# EAGLE board perfect_cubev2_ITLL version (EAGLE 9.5.1)
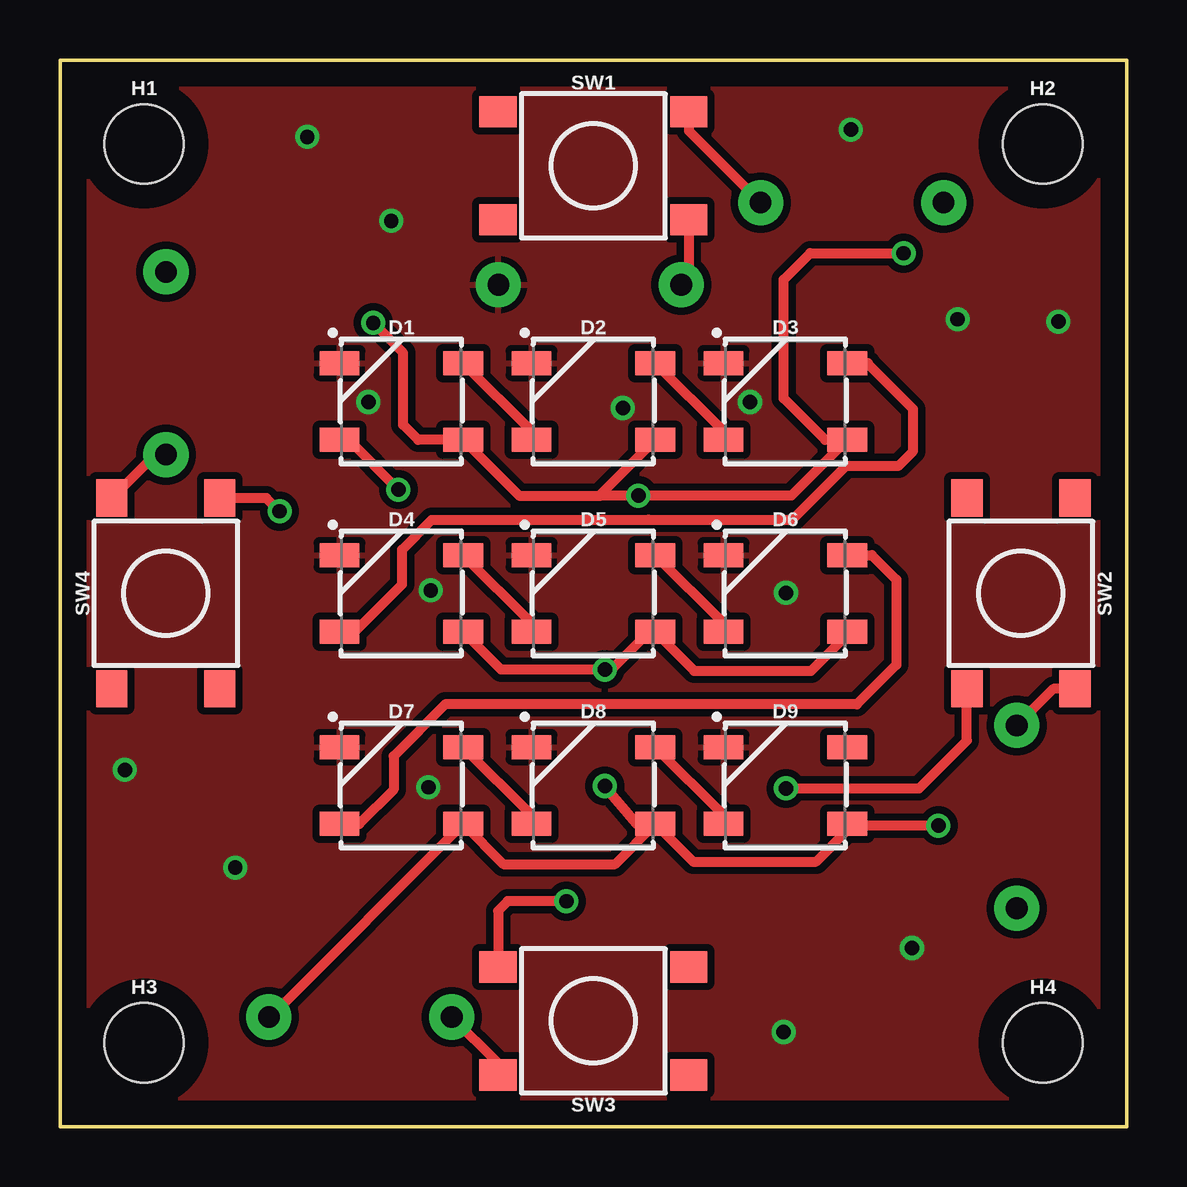
[diagram p0: board, top side]
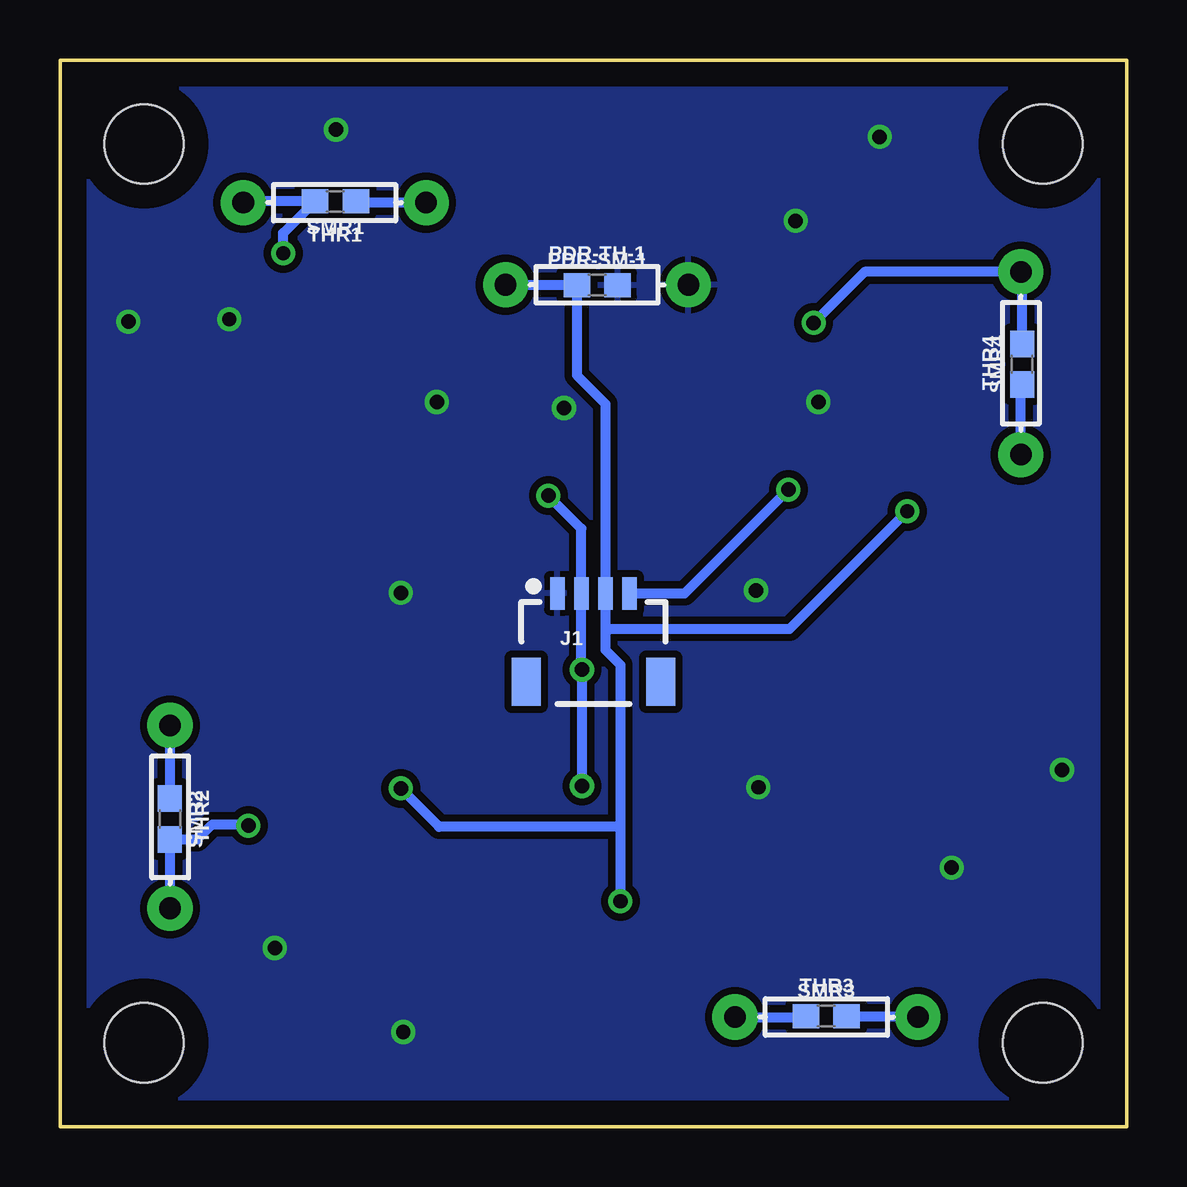
[diagram p1: board, bottom side, seen from below]

Size 44.45 x 44.45 mm. Coordinates in mm from the lower left corner, seen from the top.
Outline: 0,0 0,44.45 44.45,44.45 44.45,0 0,0
Copper layers (1*16): Top 0.035mm / dielectric 1.5mm / Bottom 0.035mm
Design rules "default *": minimum track width 12mil, minimum drill 0.6mm, track to track 12mil, track to pad 12mil, pad to pad 12mil, via to via 12mil, smd to smd 12mil, copper to edge 40mil, drill to drill 6mil, minimum pad ring 10mil, minimum via ring 8mil, stop-mask expansion 4mil, vias tented up to drill 0mil, thermal gap 10mil

## Footprints (pad centres in the part's own frame; a part is rotated, then mirrored left to right if it is on the bottom)
WS2812B = smd 1.651 x 1: 1 2.577,-1.6; 2 2.577,1.6; 3 -2.577,1.6; 4 -2.577,-1.6
STAND-OFF = hole 3.302: 0,0
1X04_1MM_RA = smd 0.6 x 1.35: 1 -1.5,0; 2 -0.5,0; 3 0.5,0; 4 1.5,0 | smd 1.2 x 2: NC1 2.8,-3.675; NC2 -2.8,-3.675
0603 = smd 1.1 x 1: 1 -0.85,0; 2 0.85,0
AXIAL-0.3 = drill 0.9 pad 1.88: P$1 -3.81,0; P$2 3.81,0
TACTILE_SWITCH_SMD_6.2MM_TALL = smd 1.55 x 1.3: A1 -3.975,-2.25; A2 3.975,-2.25; B1 -3.975,2.25; B2 3.975,2.25

## Placement (x,y rotation side)
D1  WS2812B  [WS2812B]  14.22,30.23 0 top
D2  WS2812B  [WS2812B]  22.23,30.23 0 top
D3  WS2812B  [WS2812B]  30.23,30.23 0 top
D4  WS2812B  [WS2812B]  14.22,22.23 0 top
D5  WS2812B  [WS2812B]  22.23,22.23 0 top
D6  WS2812B  [WS2812B]  30.23,22.23 0 top
D7  WS2812B  [WS2812B]  14.22,14.22 0 top
D8  WS2812B  [WS2812B]  22.23,14.22 0 top
D9  WS2812B  [WS2812B]  30.23,14.22 0 top
H1  STAND-OFF  [STAND-OFF]  3.5,40.95 0 top
H2  STAND-OFF  [STAND-OFF]  40.95,40.95 0 top
H3  STAND-OFF  [STAND-OFF]  3.5,3.5 0 top
H4  STAND-OFF  [STAND-OFF]  40.95,3.5 0 top
J1  [1X04_1MM_RA]  22.23,22.23 0 bottom
PDR-SM-1  1k  [0603]  22.07,35.06 0 bottom
PDR-TH-1  1k  [AXIAL-0.3]  22.07,35.09 0 bottom
SMR1  1k  [0603]  32.98,38.56 180 bottom
SMR2  1k  [0603]  39.88,12.82 270 bottom
SMR3  1k  [0603]  12.53,4.62 0 bottom
SMR4  1k  [0603]  4.36,31.77 90 bottom
SW1  MOMENTARY-SWITCH-SPST-SMD-6.2MM-TALL  [TACTILE_SWITCH_SMD_6.2MM_TALL]  22.23,40.04 0 top
SW2  MOMENTARY-SWITCH-SPST-SMD-6.2MM-TALL  [TACTILE_SWITCH_SMD_6.2MM_TALL]  40.04,22.23 270 top
SW3  MOMENTARY-SWITCH-SPST-SMD-6.2MM-TALL  [TACTILE_SWITCH_SMD_6.2MM_TALL]  22.23,4.41 180 top
SW4  MOMENTARY-SWITCH-SPST-SMD-6.2MM-TALL  [TACTILE_SWITCH_SMD_6.2MM_TALL]  4.41,22.23 90 top
THR1  1k  [AXIAL-0.3]  33.01,38.51 180 bottom
THR2  1k  [AXIAL-0.3]  39.87,12.91 270 bottom
THR3  1k  [AXIAL-0.3]  12.52,4.58 0 bottom
THR4  1k  [AXIAL-0.3]  4.42,31.82 90 bottom

## Library data of the parts
D1-D9 = SparkFun-LED; PROD_ID: DIO-12503
H1-H4 = SparkFun-Hardware
J1 = SparkFun-Connectors
PDR-SM-1 SMR1-SMR4 = SparkFun-Resistors; PROD_ID: RES-07856
PDR-TH-1 THR1-THR4 = SparkFun-Resistors; PROD_ID: RES-12182
SW1-SW4 = SparkFun-Switches; PROD_ID: SWCH-11966; SF_SKU: COM-12992

## Nets
5V: D1.1 D2.1 D3.1 D4.1 D5.1 D6.1 D7.1 D8.1 D9.1 J1.2 SMR1.2 SMR2.2 SMR3.2 SMR4.2 THR1.P$2 THR2.P$2 THR3.P$2 THR4.P$2
A0: J1.3 PDR-SM-1.1 PDR-TH-1.P$1 SW1.A2 SW2.A2 SW3.A2 SW4.A2
D2DI: D1.2 D2.4
D3DI: D2.2 D3.4
D4DI: D3.2 D4.4
D5DI: D4.2 D5.4
D6DI: D5.2 D6.4
D7DI: D6.2 D7.4
D8DI: D7.2 D8.4
D9DI: D8.2 D9.4
DI: D1.4 J1.4
GND: D1.3 D2.3 D3.3 D4.3 D5.3 D6.3 D7.3 D8.3 D9.3 J1.1 PDR-SM-1.2 PDR-TH-1.P$2
N$1: SMR1.1 SW1.B2 THR1.P$1
N$3: SMR2.1 SW2.B2 THR2.P$1
N$4: SMR3.1 SW3.B2 THR3.P$1
N$5: SMR4.1 SW4.B2 THR4.P$1

## Tracks (layer width: path | path; a pad name or v marks a point on that pad's centre or on a via)
5V  (via drill 0.6)
  Top 0.406: 22.55,26.3 19.13,26.3 D1.1 14.93,28.62 14.3,29.25 14.3,32.25 v13.05,33.5 | D2.1 22.55,26.37 22.55,26.3 | 22.55,26.3 v24.1,26.3 30.48,26.3 D3.1 31.88,28.62 30.15,30.35 30.15,35.3 31.25,36.4 v35.15,36.4 | D4.1 18.38,19.05 v22.7,19.05 22.98,19.05 24.55,20.62 D5.1 26.43,19 31.3,19 32.8,20.5 D6.1 | D8.1 23.13,10.95 18.48,10.95 D7.1 8.75,4.58 THR3.P$2 | D8.1 26.38,11.05 31.5,11.05 32.8,12.35 D9.1 32.88,12.55 v36.6,12.55 | D8.1 24.02,12.62 v22.7,14.2
  Bottom 0.406: THR1.P$2 36.76,38.56 SMR1.2 35.15,37.24 v35.15,36.4 | THR2.P$2 39.87,11.96 SMR2.2 38.73,11.97 38.1,12.6 36.65,12.6 v36.6,12.55 | v22.7,14.2 v22.7,19.05 22.73,19.07 J1.2 22.73,24.93 v24.1,26.3 | SMR3.2 8.74,4.62 THR3.P$2 | SMR4.2 4.36,35.56 THR4.P$2 10.93,35.62 v13.05,33.5
A0  (via drill 0.6)
  Top 0.406: SW1.A2 26.2,35.4 PDR-TH-1.P$1 | v21.1,9.4 18.65,9.4 18.25,9 SW3.A2 | v9.15,25.65 8.6,26.2 SW4.A2 | v30.25,14.1 35.8,14.1 37.79,16.09 SW2.A2
  Bottom 0.406: PDR-TH-1.P$1 22.93,35.09 PDR-SM-1.1 22.91,31.32 21.73,30.12 J1.3 21.73,20.6 | 21.73,20.6 21.73,19.88 21.1,19.25 21.1,12.5 | 21.1,12.5 v21.1,9.4 | 21.73,20.6 21.57,20.75 14.05,20.75 v9.15,25.65 | 21.1,12.5 28.65,12.5 v30.25,14.1
D2DI
  Top 0.406: D1.2 19.65,28.98 D2.4
D3DI
  Top 0.406: D2.2 27.65,28.98 D3.4
D4DI
  Top 0.406: 33.67,31.82 D3.2 33.62,31.82 35.55,29.9 35.55,28.15 34.95,27.55 32.75,27.55 30.5,25.3 24.53,25.3 24.52,25.29 15.49,25.29 14.25,24.05 14.25,22.6 12.28,20.62 D4.4
D5DI
  Top 0.406: D4.2 19.65,20.98 D5.4
D6DI
  Top 0.406: D5.2 27.65,20.98 D6.4
D7DI
  Top 0.406: D6.2 33.83,23.82 34.85,22.8 34.85,19.25 33.2,17.6 16.05,17.6 13.9,15.45 13.9,14.05 12.47,12.62 D7.4
D8DI
  Top 0.406: D7.2 19.65,12.98 D8.4
D9DI
  Top 0.406: D8.2 27.65,12.98 D9.4
DI  (via drill 0.6)
  Top 0.406: v14.1,26.55 12.03,28.62 D1.4
  Bottom 0.406: J1.4 18.43,22.23 v14.1,26.55
GND  (via drill 0.6)
  other vias: 30.25,22.25 41.6,33.55 37.4,33.65 30.15,3.95 35.5,7.45 7.3,10.8 2.7,14.88 15.45,22.35 12.85,30.2 28.75,30.2 23.45,29.95 15.35,14.15 13.8,37.75 10.3,41.25 32.95,41.55
  pour Top: 0,44 44,44 44,0 0,0
  pour Bottom: 0,44 44,44 44,0 0,0
N$1
  Top 0.406: SW1.B2 26.2,41.5 THR1.P$1
  Bottom 0.406: THR1.P$1 32.06,38.51 SMR1.1
N$3
  Top 0.406: SW2.B2 41.39,18.25 THR2.P$1
  Bottom 0.406: THR2.P$1 SMR2.1
N$4
  Top 0.406: SW3.B2 18.25,2.65 THR3.P$1
  Bottom 0.406: THR3.P$1 13.41,4.58 SMR3.1
N$5
  Top 0.406: SW4.B2 3.97,28 THR4.P$1
  Bottom 0.406: THR4.P$1 4.42,30.86 SMR4.1